# EAGLE board followLineSensor (EAGLE 8.2.0)
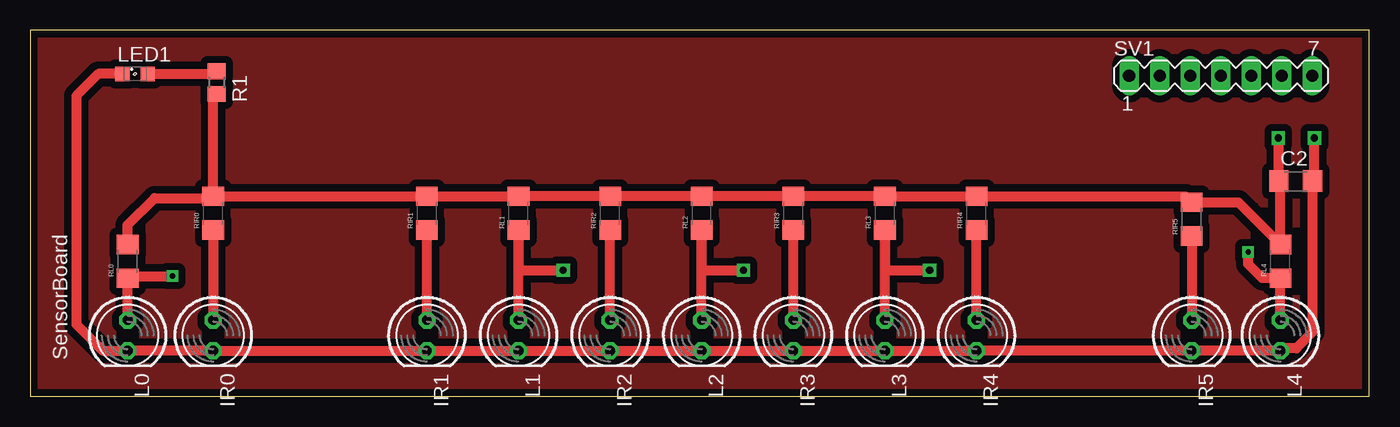
[diagram p0: board, top side]
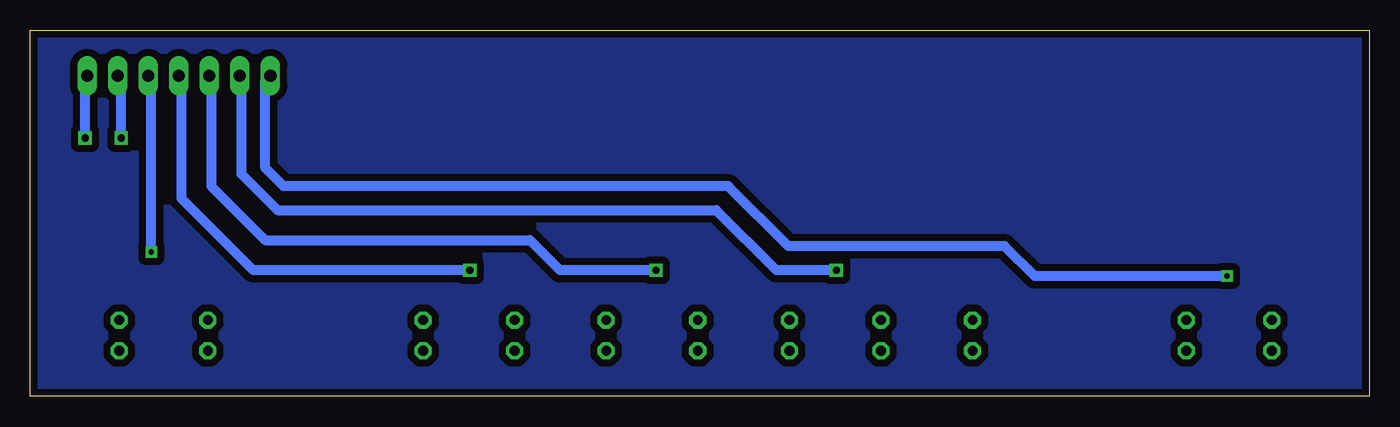
[diagram p1: board, bottom side, seen from below]

Size 111.43 x 30.47 mm. Coordinates in mm from the lower left corner, seen from the top.
Outline: 0,0 111.43,0 111.43,30.47 0,30.47 0,0
Copper layers (1*16): Top 0.035mm / dielectric 1.5mm / Bottom 0.035mm
Design rules "SparkFun": minimum track width 8mil, minimum drill 20mil, track to track 8mil, track to pad 8mil, pad to pad 8mil, via to via 8mil, smd to smd 8mil, copper to edge 8mil, drill to drill 8mil, minimum pad ring 12mil, minimum via ring 10mil, stop-mask expansion 4mil, vias tented up to drill 20mil, thermal gap 10mil

## Footprints (pad centres in the part's own frame; a part is rotated, then mirrored left to right if it is on the bottom)
C1206 = smd 1.6 x 1.8: 1 -1.4,0; 2 1.4,0
LED5MM = drill 0.813 octagon: A -1.27,0; K 1.27,0
SML0805 = smd 1.2 x 1.2: A 1.05,0; C -1.05,0
R0805 = smd 1.3 x 1.5: 1 -0.95,0; 2 0.95,0
1206 = smd 1.6 x 1.8: 1 -1.4,0; 2 1.4,0
MA07-1 = drill 1.016 long: 1 -7.62,0; 2 -5.08,0; 3 -2.54,0; 4 0,0; 5 2.54,0; 6 5.08,0; 7 7.62,0

## Placement (x,y rotation side)
C2  1uF  [C1206]  105.29,17.91 0 top
IR0  [LED5MM]  15.24,5.08 270 top
IR1  [LED5MM]  33.02,5.08 270 top
IR2  [LED5MM]  48.26,5.08 270 top
IR3  [LED5MM]  63.5,5.08 270 top
IR4  [LED5MM]  78.74,5.08 270 top
IR5  [LED5MM]  96.64,5.08 270 top
L0  [LED5MM]  8.12,5.08 270 top
L1  [LED5MM]  40.64,5.08 270 top
L2  [LED5MM]  55.88,5.08 270 top
L3  [LED5MM]  71.12,5.08 270 top
L4  [LED5MM]  104.02,5.08 270 top
LED1  green  [SML0805]  8.74,26.83 0 top
R1  820  [R0805]  15.52,26.1 270 top
RIR0  270  [1206]  15.24,15.24 90 top
RIR1  270  [1206]  33.02,15.24 90 top
RIR2  270  [1206]  48.26,15.24 90 top
RIR3  270  [1206]  63.5,15.24 90 top
RIR4  270  [1206]  78.74,15.24 90 top
RIR5  270  [1206]  96.64,14.74 90 top
RL0  18K  [1206]  8.12,11.24 90 top
RL1  18K  [1206]  40.64,15.24 90 top
RL2  18K  [1206]  55.88,15.24 90 top
RL3  18K  [1206]  71.12,15.24 90 top
RL4  18K  [1206]  104.02,11.24 90 top
SV1  [MA07-1]  99.06,26.67 0 top

## Library data of the parts
C2 R1 = rcl
IR0 IR1-IR5 L0 L1-L4 LED1 = led
RIR0 RIR1-RIR5 RL0 RL1-RL4 = SparkFun-Passives
SV1 = con-lstb; OC_FARNELL: unknown; OC_NEWARK: unknown

## Nets
A0: L0.A RL0.1 SV1.1
A1: L1.A RL1.1 SV1.2
A2: L2.A RL2.1 SV1.3
A3: L3.A RL3.1 SV1.4
A4: L4.A RL4.1 SV1.5
GND: C2.2 IR0.K IR1.K IR2.K IR3.K IR4.K IR5.K L0.K L1.K L2.K L3.K L4.K LED1.C SV1.7
N$1: IR1.A RIR1.1
N$2: LED1.A R1.1
N$3: IR5.A RIR5.1
N$17: IR4.A RIR4.1
N$18: IR3.A RIR3.1
N$19: IR2.A RIR2.1
N$21: IR0.A RIR0.1
VBAT: C2.1 R1.2 RIR0.2 RIR1.2 RIR2.2 RIR3.2 RIR4.2 RIR5.2 RL0.2 RL1.2 RL2.2 RL3.2 RL4.2 SV1.6

## Tracks (layer width: path | path; a pad name or v marks a point on that pad's centre or on a via)
A0  (via drill 0.45)
  Top 0.813: L0.A RL0.1 8.12,10 v11.85,10
  Bottom 0.813: v11.85,10 27.85,10 30.35,12.5 48.35,12.5 53.35,17.5 90.35,17.5 91.85,19 91.85,26.26 SV1.1
A1  (via drill 0.6)
  Top 0.813: L1.A RL1.1 40.64,10.5 v44.35,10.5
  Bottom 0.813: v44.35,10.5 49.35,10.5 54.35,15.5 90.85,15.5 93.85,18.5 93.85,26.54 SV1.2
A2  (via drill 0.6)
  Top 0.813: L2.A RL2.1 55.88,10.5 v59.35,10.5
  Bottom 0.813: v59.35,10.5 67.35,10.5 69.85,13 91.85,13 96.35,17.5 96.35,26.5 SV1.3
A3  (via drill 0.6)
  Top 0.813: L3.A RL3.1 71.12,10.5 v74.85,10.5
  Bottom 0.813: SV1.4 98.85,26.46 98.85,16.5 92.85,10.5 v74.85,10.5
A4  (via drill 0.45)
  Top 0.813: L4.A RL4.1 102.51,9.84 101.35,11 v101.35,12
  Bottom 0.813: v101.35,12 101.35,26.42 SV1.5
GND  (via drill 0.6)
  Top 0.406: L3.K 78.85,3.81 78.85,4
  Top 0.813: IR4.K L3.K IR3.K L2.K IR2.K L1.K IR1.K IR0.K L0.K 6.04,3.81 3.85,6 3.85,25 5.68,26.83 LED1.C | v106.85,21.5 106.85,18.07 C2.2 106.69,5.34 105.35,4 104.21,4 L4.K IR5.K 78.85,3.81
  Bottom 0.813: v106.85,21.5 106.85,26.67 SV1.7
N$1
  Top 0.813: IR1.A RIR1.1
N$2
  Top 0.813: LED1.A 15.3,26.83 R1.1
N$3
  Top 0.813: RIR5.1 IR5.A
N$4
  pour Bottom (isolate 0.61): -0.15,30.5 111.35,30.5 111.35,0 -0.15,0
N$5
  pour Top (isolate 0.61): -0.15,30 111.35,30.5 111.35,0 -0.15,0
N$17
  Top 0.813: IR4.A RIR4.1
N$18
  Top 0.813: IR3.A RIR3.1
N$19
  Top 0.813: IR2.A RIR2.1
N$21
  Top 0.813: RIR0.1 IR0.A
VBAT  (via drill 0.6)
  Top 0.813: v103.85,21.5 103.89,21.5 C2.1 104.02,17.78 RL4.2 100.52,16.14 RIR5.2 96.14,16.64 RIR4.2 RL3.2 RIR3.2 RL2.2 RIR2.2 RL1.2 RIR1.2 RIR0.2 | RL0.2 8.12,14.27 10.35,16.5 15.1,16.5 RIR0.2 | RIR0.2 15.24,24.87 R1.2
  Bottom 0.813: v103.85,21.5 103.85,26.38 SV1.6

## Text on the board
tPlace: SensorBoard